# Altium PCB PCB1.PcbDoc
Units mil, origin at the board's own origin, x right, y up, seen from the top; angles counter-clockwise.
Board outline 1161.95 x 1752.5 mil, 2 copper layers (Top Layer, Bottom Layer); 51 components, 40 nets, 198 pads, 66 vias.
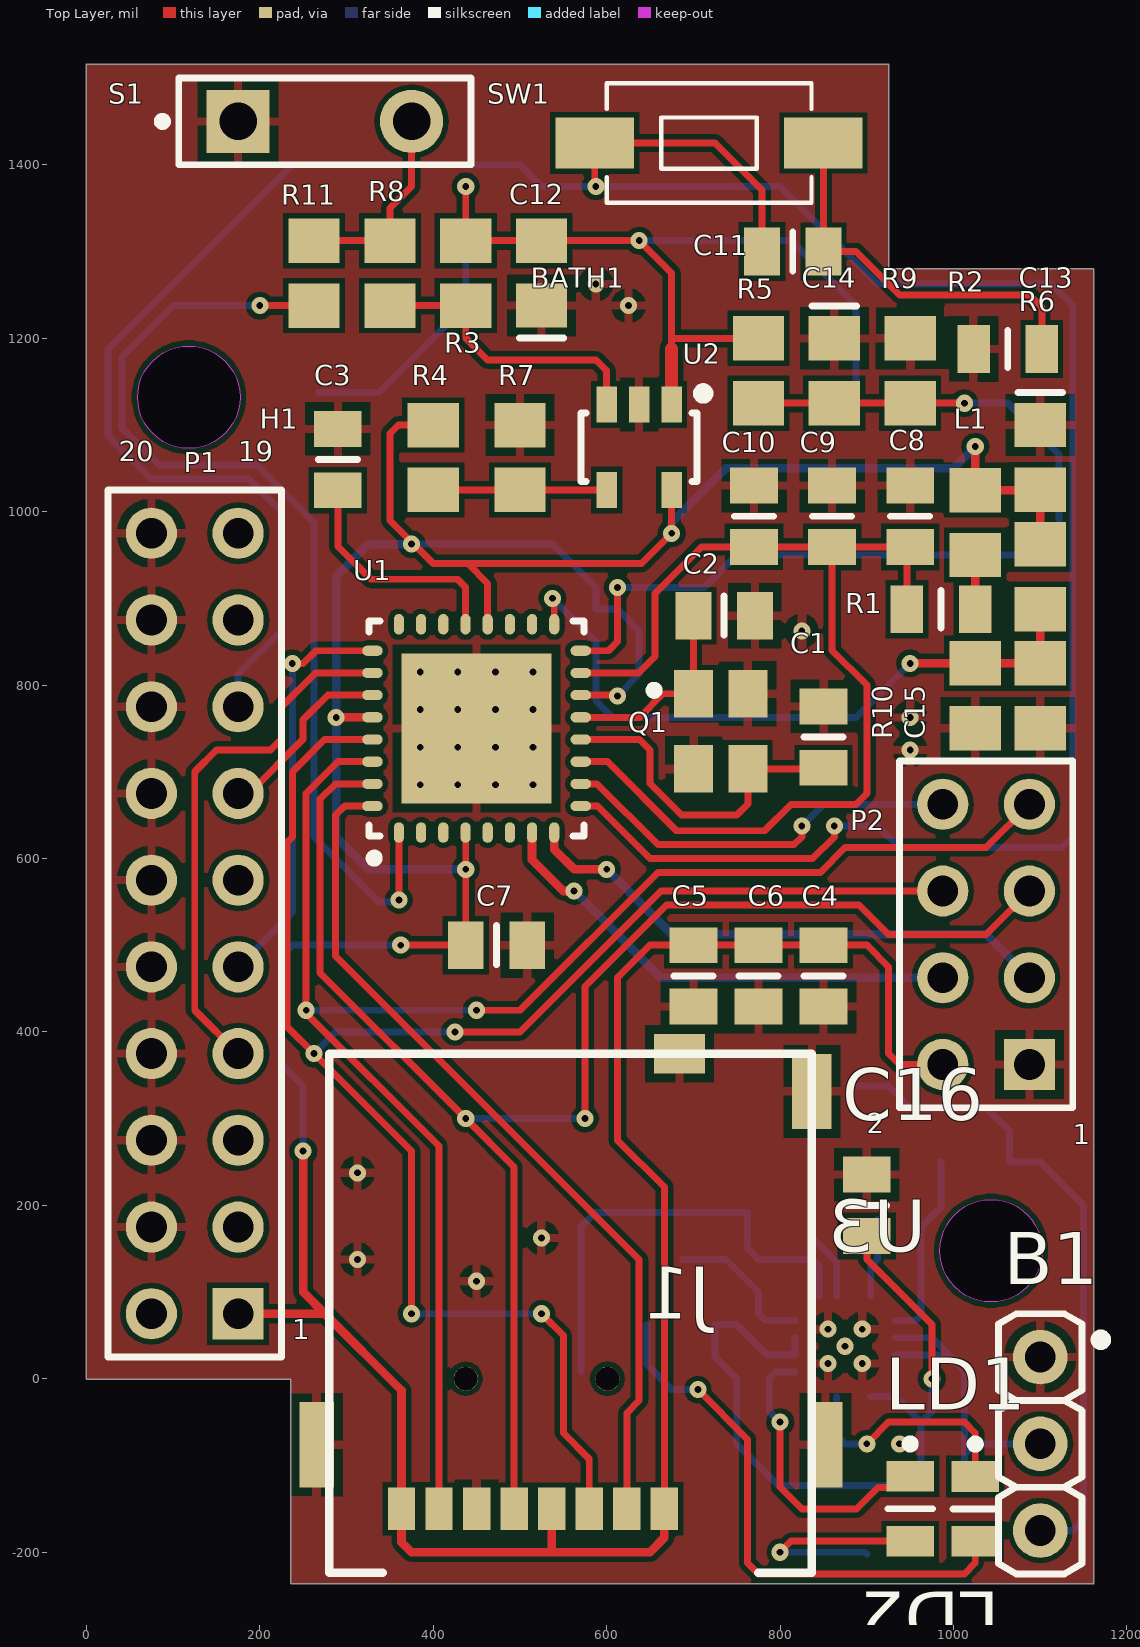
[diagram p0: Top Layer view]
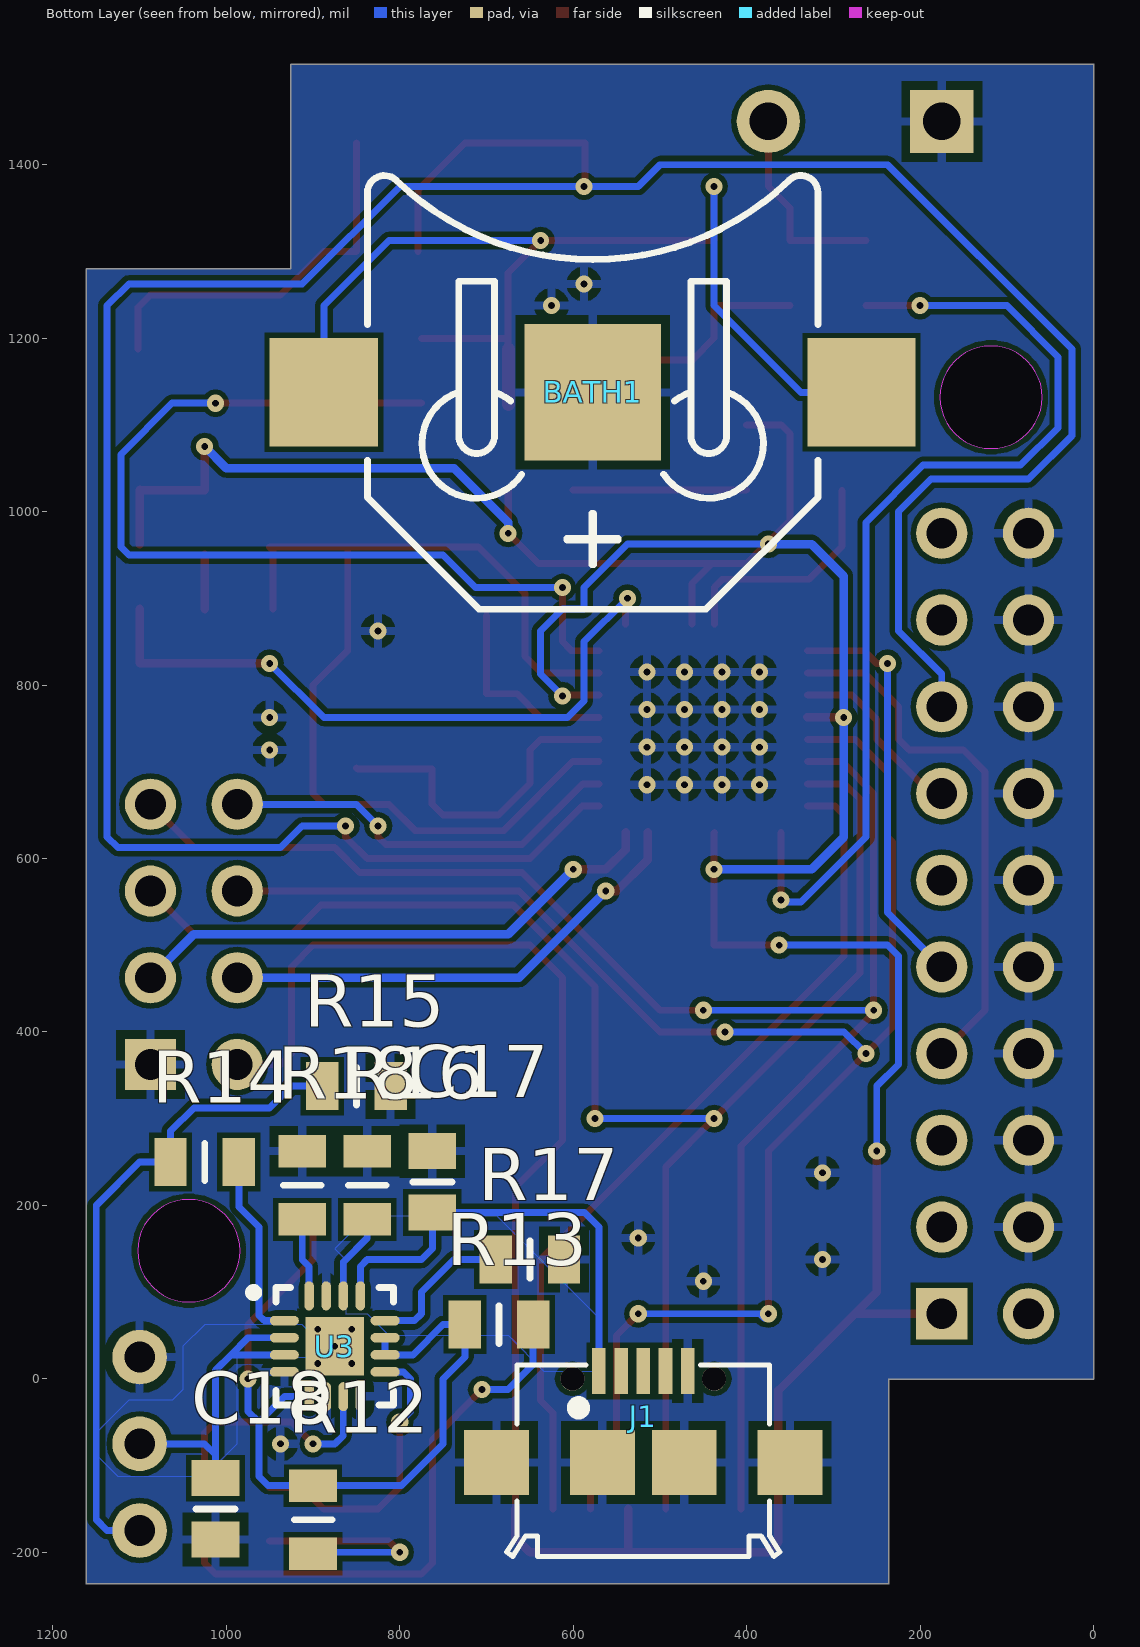
[diagram p1: Bottom Layer view, seen from below]
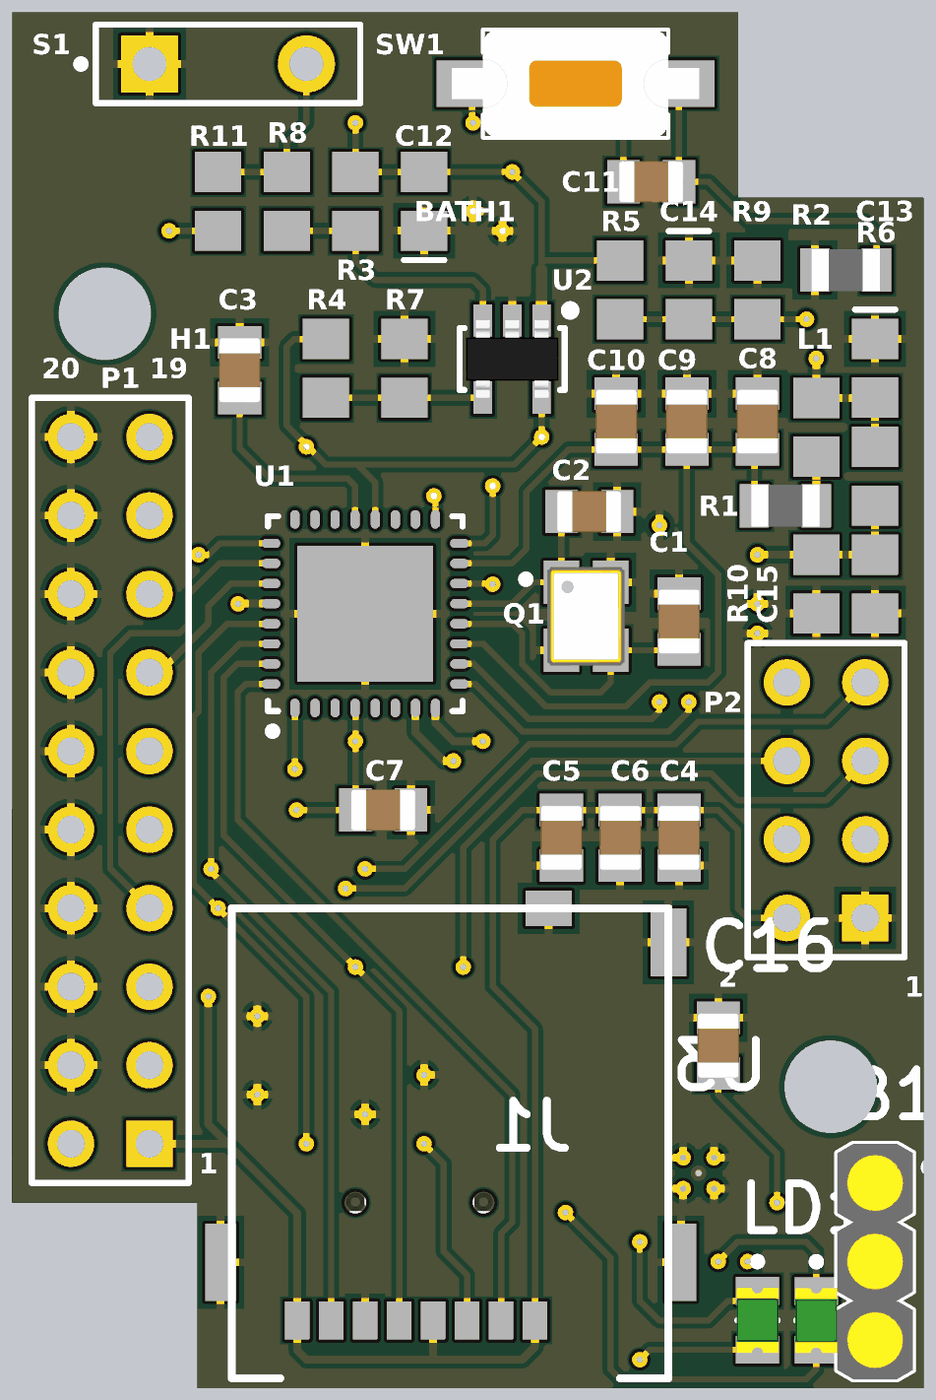
[diagram p2: 3D render of the assembled board from above, using the file's embedded part models]
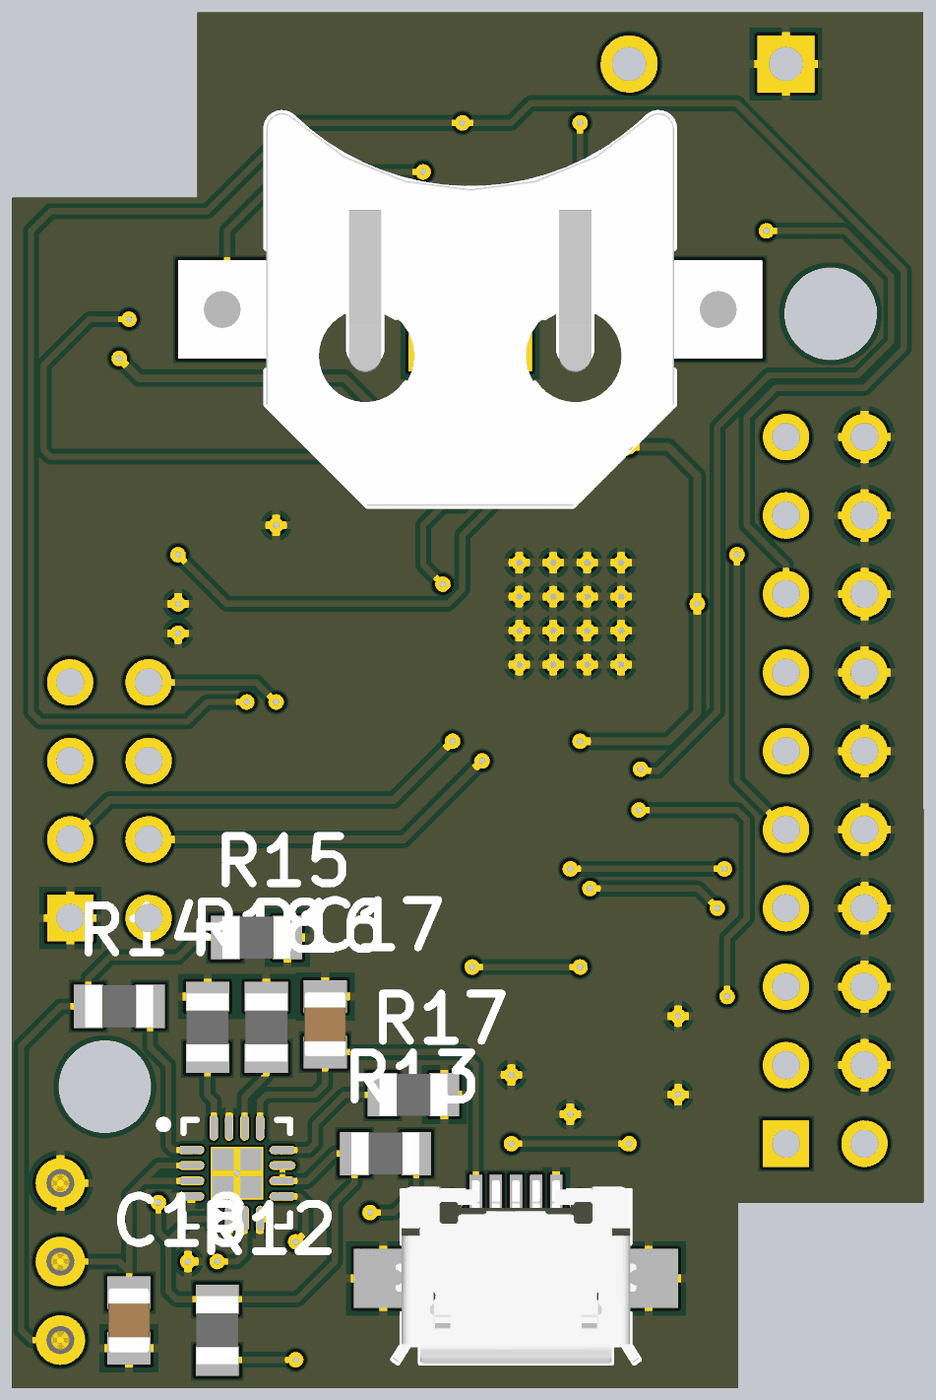
[diagram p3: 3D render of the assembled board from below, using the file's embedded part models]

## Layer stack, top to bottom
Top Solder: solder mask 0.4, Solder Resist, Dk 3.5
Top Layer: signal copper 1.4
Dielectric 1: dielectric 12.6, FR-4, Dk 4.8
Bottom Layer: signal copper 1.4
Bottom Solder: solder mask 0.4, Solder Resist, Dk 3.5

## Board outline
0,-0.27 cw(c0,0) -0.26,0 -0.26,1515.75 cw(c0,1515.75) 0,1516.01 925.2,1516.01 cw(c925.2,1515.75) 925.46,1515.75 925.46,1279.79 1161.42,1279.79 cw(c1161.42,1279.53) 1161.68,1279.53 1161.68,-236.22 cw(c1161.42,-236.22) 1161.42,-236.49 236.22,-236.49 cw(c236.22,-236.22) 235.96,-236.22 235.96,-0.27
cut-out: 1043.31,88.58 cw(c1043.31,147.64) 984.25,147.64 cw(c1043.31,147.64) 1043.31,206.69 cw(c1043.31,147.64) 1102.36,147.64 cw(c1043.31,147.64)
cut-out: 118.11,1072.83 cw(c118.11,1131.89) 59.06,1131.89 cw(c118.11,1131.89) 118.11,1190.94 cw(c118.11,1131.89) 177.17,1131.89 cw(c118.11,1131.89)

## Design rules (kind name [scope] priority, off if disabled: settings)
Clearance Clearance_1 [InNamedPolygon('NETB1_2_L02_P006')] p1: gap=8 ignorepadtopadclearanceinfootprint=FALSE
Clearance [All] p2: gap=6 ignorepadtopadclearanceinfootprint=FALSE
MinimumSolderMaskSliver [All] p1: minsoldermaskwidth=0
PlaneClearance [All] p1: clearance=8
PolygonConnect [All] p1: connectstyle=Relief reliefconductorwidth=10 reliefentries=4 polygonreliefangle="90 Angle" airgapwidth=10
RoutingVias [All] p1: holewidth=28 width=50 viastyle="Through Hole" minholewidth=28 minwidth=50 maxholewidth=28 maxwidth=50 useviatemplates=TRUE viatemplateguid#1={8B917390-28B2-4EA5-9BB1-488258DD5807} viatemplatename#1=v50h20
SilkToSilkClearance [All] p1: silktosilkclearance=0
SilkToSolderMaskClearance [IsPad] p1: minsilkscreentomaskgap=0 clearancetoexposedcopper=TRUE
SolderMaskExpansion [All] p1: expansion=4
Width [All] p1: maxlimit=15 minlimit=6 preferedwidth=8
26 further rules are at their usual default settings.

## Classes and differential pairs
component class U_mcu: C1 C2 C3 C4 C5 C6 C7 C11 C12 C17 C18 L1 P1 Q1 R15 R17 SW1 U1
component class U_power: BATH1 C12 C13 C14 C15 R3 R4 R5 R6 R7 R8 R9 R10 R11 S1 U2
component class U_sensor: B1 C6 C9 C16 C17 C18 H1 J1 LD1 LD2 P2 R1 R2 R12 R13 R14 R15 R16 R17 R18 U3

## Components (designator, comment, footprint, x,y, rotation, side; value= is the part's Value field where it differs from the comment)
B1 "Test Point" COMATEL_331.0600.1.03.500 1100,25 r270 top
BATH1 "Value" BATH_KEYSTONE_3000 577.56,1137.5 r180 bottom
C1 "22pF" CAPC2012X135N 850,740 r270 top
C2 "22pF" CAPC2012X135N 735.43,880 r180 top
C3 "1uF" CAPC2012X135N 290,1060 r270 top
C4 "10uF" CAPC2012X135N 850,464.57 r90 top
C5 "100nF" CAPC2012X135N 700,464.57 r90 top
C6 "100nF" CAPC2012X135N 775,464.57 r90 top
C7 "100nF" CAPC2012X135N 472.93,500 r180 top
C8 "10uF" CAPC2012X135N 950,994.57 r270 top
C9 "10nF" CAPC2012X135N 860,994.57 r270 top
C10 "10nF" CAPC2012X135N 770,994.57 r270 top
C11 "22pF" CAPC2012X135N 814.57,1300 r180 top
C12 "C0805" 0805 525,1275.1 r90 top value=1uF
C13 "C0805" 0805 1100,1062.5 r270 top value=1uF
C14 "C0805" 0805 862.5,1162.4 r270 top value=1uF
C15 "C0805" 0805 1100,787.6 r90 top value=1uF
C16 "4.7uF" CAPC2012X135N 900,200 r270 top
C17 "1uF" CAPC2012X135N 762.5,227.07 r270 bottom
C18 "4.7uF" CAPC2012X135N 1012.5,-150 r90 bottom
H1 "SDKART" PCBComponent_1 836.61,324.8 r180 top
J1 "629105136821" 629105136821 519.19,-88.58 r180 bottom
L1 "BLM21BD102SN1D" 6-0805 1025,987.4 r270 top
LD1 "Green" LED_OSRAM_LGR971 950,-149.9 r270 top
LD2 "Green" LED_OSRAM_LGR971 1025,-150.1 r270 top
P1 "Header 10X2" HDR2X10 175,75 r90 top
P2 "Header 4X2" HDR2X4 1087.5,362.5 r90 top
Q1 "25MHz" XTAL_EPSON_TSX-3225 731.5,746.69 r0 top
R1 "1R" RESC2012X60N 985.63,887.5 r0 top
R2 "1K" RESC2012X60N 1062.5,1187.5 r0 top
R3 "ERA6Y" ERA-0805 437.5,1275 r90 top value=100K
R4 "ERA6Y" ERA-0805 400,1062.4 r90 top value=150K
R5 "ERA6Y" ERA-0805 775,1162.4 r90 top value=100K
R6 "ERA6Y" ERA-0805 1100,925 r90 top value=100K
R7 "ERA6Y" ERA-0805 500,1062.4 r270 top value=100K
R8 "ERA6Y" ERA-0805 350,1275 r270 top value=0R
R9 "ERA6Y" ERA-0805 950,1162.4 r270 top value=100K
R10 "ERA6Y" ERA-0805 1025,787.6 r90 top value=100K
R11 "ERA6Y" ERA-0805 262.5,1275 r270 top value=0R
R12 "1K" RESC2012X60N 900,-162.5 r90 bottom
R13 "1K" RESC2012X60N 685.63,62.5 r0 bottom
R14 "47K" RESC2012X60N 1025,250 r180 bottom
R15 "47K" RESC2012X60N 850,337.5 r180 bottom
R16 "47K" RESC2012X60N 837.5,223.13 r270 bottom
R17 "1K" RESC2012X60N 650,137.5 r0 bottom
R18 "680R" RESC2012X60N 912.5,223.13 r270 bottom
S1 "REED" SPST-2 275,1450 r0 top
SW1 "434111043826" 434111043826 718.11,1425 r180 top
U1 "EFM32TG210F32-QFN32" ENMR-QFN32_N 450,750 r90 top
U2 "000000" SOT-25 637.4,1074.21 r270 top value=AP2127
U3 "BQ24075RGTR" RGT16-1700X1700TP 875,37.5 r180 bottom

## Footprints (in the part's own frame and the unit in brackets; to place one, negate y for a bottom-side part, rotate by r counter-clockwise, add the part's x,y. Pads: shape width x height; smd on the part's side, far side on the other; paste and mask are expansions set on the pad)
6-0805 [mm] "Chip Resistor; Body 2 x 1.2 mm (LxW typ)"
  rect 1.3x1.5 smd: 1(-0.95,0) 2(0.95,0)
0805 [mm] "Chip Capacitor; Body 2.0 x 1.2 mm (LxW typ)"
  rect 1.3x1.5 smd: 1(-0.95,0) 2(0.95,0)
  silkscreen extent -1.9,-0.65 -1.9,0.65
434111043826 [mm] "6.0*3.5mm vertical type, SMD, height 4.3mm, white actuator, 260gf, T&R"
  rect 2.3x1.5 smd: 1(-3.35,0) 2(3.35,0)
  silkscreen extent -3,-1.75 3,1.75, body extent -4,-1.75 4,1.75, height 4.3
629105136821 [mm] "Micro USB 2.0 SMT Type B Horizontal 5 Contacts"
  rect 0.4x1.35 smd: 1(-1.3,2.475) 2(-0.65,2.475) 3(0,2.475) 4(0.65,2.475) 5(1.3,2.475)
  rect 1.9x1.9 smd: Shell(-4.3,-0.2) Shell(-1.2,-0.2) Shell(1.2,-0.2) Shell(4.3,-0.2)
  round 0.7 hole 0.7 unplated: ""(-2.075,2.25) ""(2.075,2.25)
  silkscreen extent -4,-2.95 4,2.65, body extent -4,-2.95 4,2.97, height 2.75
BATH_KEYSTONE_3000 [mm] "SMD Battery Holder for BR1216, CR1216, BR1220, CL1220, CR1220, BR1225 Coin Cells"
  rect 3.175x3.175 smd: 1(-7.873,0) 1(7.873,0)
  rect 4x4 smd paste-2: 2(0,0)
  silkscreen extent -6.6,-6.35 6.6,6.35, body extent -9.46,-6.35 9.46,6.35, height 3.17
CAPC2012X135N [mm] "Chip Capacitor, Body 2.0x1.25mm, IPC Medium Density"
  rect 1.05x1.4 smd: 1(-0.9,0) 2(0.9,0)
  silkscreen extent 0,-0.58 0,0.58, body extent -1.05,-0.67 1.05,0.68, height 1.25
COMATEL_331.0600.1.03.500 [mm] "3 \"U\" Pins Strip Terminals Components Support, Pitch 2.54mm"
  round 1.6 hole 0.9: 1(0,0) 2(2.54,0) 3(5.08,0)
  silkscreen extent -1.27,-1.23 6.35,1.93, body extent -1.27,-1.22 6.35,1.23, height 5.7
ENMR-QFN32_N [mm] "QFN, 32-Leads, Body 6x6mm, Pitch 0.65mm, Thermal Pad 4.4x4.4mm, IPC Medium Density"
  rect 4.4x4.4 smd: 0(0,0)
  oval 0.6x0.3 smd: 1(-3.05,2.275) 2(-3.05,1.625) 3(-3.05,0.975) 4(-3.05,0.325) 5(-3.05,-0.325) 6(-3.05,-0.975) 7(-3.05,-1.625) 8(-3.05,-2.275) 17(3.05,-2.275) 18(3.05,-1.625) 19(3.05,-0.975) 20(3.05,-0.325) 21(3.05,0.325) 22(3.05,0.975) 23(3.05,1.625) 24(3.05,2.275)
  oval 0.3x0.6 smd: 9(-2.275,-3.05) 10(-1.625,-3.05) 11(-0.975,-3.05) 12(-0.325,-3.05) 13(0.325,-3.05) 14(0.975,-3.05) 15(1.625,-3.05) 16(2.275,-3.05) 25(2.275,3.05) 26(1.625,3.05) 27(0.975,3.05) 28(0.325,3.05) 29(-0.325,3.05) 30(-0.975,3.05) 31(-1.625,3.05) 32(-2.275,3.05)
  silkscreen extent -3.92,-3.15 3.15,3.15, body extent -3,-3 3,3, height 0.9
ERA-0805 [mm] "Chip Resistor; Body 2 x 1.3 mm (LxW typ)"
  rect 1.3x1.5 smd: 1(-0.95,0) 2(0.95,0)
HDR2X4 [mm] "Connector; Header; 4x2 Position"
  rect 1.5x1.5 hole 0.9: 1(0,0)
  round 1.5 hole 0.9: 2(0,2.54) 3(2.54,0) 4(2.54,2.54) 5(5.08,0) 6(5.08,2.54) 7(7.62,0) 8(7.62,2.54)
  silkscreen extent -1.27,-1.27 8.89,3.81
HDR2X10 [mm] "Connector; Header; 10x2 Position"
  rect 1.5x1.5 hole 0.9: 1(0,0)
  round 1.5 hole 0.9: 2(0,2.54) 3(2.54,0) 4(2.54,2.54) 5(5.08,0) 6(5.08,2.54) 7(7.62,0) 8(7.62,2.54) 9(10.16,0) 10(10.16,2.54) 11(12.7,0) 12(12.7,2.54) 13(15.24,0) 14(15.24,2.54) 15(17.78,0) 16(17.78,2.54) 17(20.32,0) 18(20.32,2.54) 19(22.86,0) 20(22.86,2.54)
  silkscreen extent -1.27,-1.27 24.13,3.81
LED_OSRAM_LGR971 [mm] "Green Chip LED, 2-Leads, Body 2.0x1.25mm, IPC Medium Density"
  rect 0.9x1.4 smd: 1(-0.95,0) 2(0.95,0)
  silkscreen extent -2.02,-0.65 0,0.65, body extent -1.05,-0.67 1.05,0.68, height 0.9
PCBComponent_1 [mm]
  rect 0.8x1.24 smd: 1(4.32,12.06) 2(5.42,12.06) 3(6.52,12.06) 4(7.62,12.06) 5(8.72,12.06) 6(9.82,12.06) 7(10.92,12.06) 8(12.02,12.06)
  rect 1x2.5 smd: 6(-0.4,10.18) 6(14.5,10.18)
  rect 1.15x2.2 smd: 6(0,-0.17)
  rect 1.5x1.15 smd: 6(3.88,-1.27)
  silkscreen extent 0,-1.27 14.14,13.93
RESC2012X60N [mm] "Chip Resistor, EIA 0805, Metric 2012, Body 2.0x1.2mm, IPC Medium Density"
  rect 0.95x1.4 smd: 1(-1,0) 2(1,0)
  silkscreen extent 0,-0.55 0,0.55, body extent -1.1,-0.67 1.1,0.68, height 0.6
RGT16-1700X1700TP [mm] "QFN, 16-Leads, Body 3x3mm, Pitch 0.5mm, Thermal Pad 1.7x1.7mm, TI Recommended"
  oval 0.85x0.28 smd paste-0.025 mask+0.07: 1(-1.475,0.75) 2(-1.475,0.25) 3(-1.475,-0.25) 4(-1.475,-0.75) 9(1.475,-0.75) 10(1.475,-0.25) 11(1.475,0.25) 12(1.475,0.75)
  oval 0.28x0.85 smd paste-0.025 mask+0.07: 5(-0.75,-1.475) 6(-0.25,-1.475) 7(0.25,-1.475) 8(0.75,-1.475) 13(0.75,1.475) 14(0.25,1.475) 15(-0.25,1.475) 16(-0.75,1.475)
  rect 1.7x1.7 smd paste-0.85 mask+0.07: 17(0,0)
  silkscreen extent -2.5,-1.73 1.73,1.73, body extent -1.57,-1.57 1.58,1.58, height 1
SOT-25 [mm] "5-Lead Plastic Small Outline Transistor - Medium Density"
  rect 1.05x0.6 smd: 1(-1.25,0.95) 2(-1.25,0) 3(-1.25,-0.95) 4(1.25,-0.95) 5(1.25,0.95)
  silkscreen extent -1.72,-1.7 1,2.02, body extent -1.25,-1.5 1.25,1.5, height 1.09
SPST-2 [mm] "Switch; 2 Leads"
  rect 1.85x1.85 hole 1.1: 1(-2.54,0)
  round 1.85 hole 1.1: 2(2.54,0)
  silkscreen extent -4.89,-1.27 4.28,1.27
XTAL_EPSON_TSX-3225 [mm] "Oscillator TSX-3225 Serie, Corner Concave; 4 pin, 2.50mm L X 3.2mm W X 0.6mm H"
  rect 1.15x1.4 smd: 1(-0.8,1.1) 2(-0.8,-1.1) 3(0.8,-1.1) 4(0.8,1.1)
  silkscreen extent -2.07,1.08 -1.83,1.32, body extent -1.25,-1.6 1.25,1.6, height 0.6

## Part data
B1: library part COMATEL_331.0600.1.03.500, "3 Positions Terminal Strip", Manufacturer="KONTEK COMATEL", Manufacturer Part Number=331.0600.1.03.500, Author="CERN DEM JLC", ComponentHeight=5.7mm, Component Type=Standard, CreateDate=16.12.2010, Family="Test Point", HelpURL=\\cern.ch\dfs\Applications\Altium\Datasheets\COMATEL_331.0600.1.03.500.pdf, LatestRevisionDate=27.08.2013, Mounted=Yes, Part Description="3 \"U\" Pins Strip Terminals Components Support, Pitch 2.54mm", Part Number=COMATEL_331.0600.1.03.500, Pin Count=3, SMD=No, Socket=No, Status=Obsolete, Table="STELVIO-KONTEK COMATEL"
BATH1: library part BATH_KEYSTONE_3000, "Battery Holder whit 2 Pin", Manufacturer=KEYSTONE, Manufacturer Part Number=3000, Author="CERN DEM JLC", ComponentHeight=3.17mm, Component Type=Standard, CreateDate=17.04.2012, Family=Battery, HelpURL=\\cern.ch\dfs\Applications\Altium\Datasheets\BATH_KEYSTONE_3000.pdf, LatestRevisionDate=17.04.2012, Mounted=Yes, PackageDescription="SMD Battery Holders for BR1216, CR1216, BR1220, CL1220, CR1220, BR1225 Coin Cells", Part Description="SMD Battery Holders for BR1216, CR1216, BR1220, CL1220, CR1220, BR1225 Coin Cells", Part Number=BATH_KEYSTONE_3000, Pin Count=3, SMD=No, Socket=No, Table=Batteries
C1 C2 C4 C5 C6 C7 C8 C9 C10 C11 C16 C17 C18: library part CC0805_10NF_50V_10%_X7R, "Non-polarised capacitor", Case=0805, Manufacturer=GENERIC, Manufacturer1 ComponentHeight=1.35mm, Manufacturer1 Example=EPCOS, Manufacturer1 Part Number=B37941K5103K60, Tolerance=±10%, Voltage=50V, Author="CERN DEM JLC", Component Type=Standard, CreateDate=03.12.2007, HelpURL=\\cern.ch\dfs\Applications\Altium\Datasheets\CC0805_X7R_EPCOS.pdf, LatestRevisionDate=03.12.2007, Manufacturer Part Number=CC0805_10NF_50V_10%_X7R, Mounted=Yes, Part Description="SMD Multilayer Chip Ceramic Capacitor", Part Number=CC0805_10NF_50V_10%_X7R, Pin Count=2, SMD=Yes, Socket=No, Status=Preferred, Table="Capacitors SMD", TC=X7R
C3: library part CC0805_1NF_50V_5%_X7R, "Non-polarised capacitor", Case=0805, Manufacturer=GENERIC, Manufacturer1 ComponentHeight=0.94mm, Manufacturer1 Example=AVX, Manufacturer1 Part Number=08055C102JAT2A, Tolerance=±5%, Voltage=50V, Author="CERN DEM JLC", Component Type=Standard, CreateDate=18.01.2011, HelpURL=\\cern.ch\dfs\Applications\Altium\Datasheets\CC0805_X7R_AVX.pdf, LatestRevisionDate=18.01.2011, Manufacturer Part Number=CC0805_1NF_50V_5%_X7R, Mounted=Yes, Part Description="SMD Multilayer Chip Ceramic Capacitor", Part Number=CC0805_1NF_50V_5%_X7R, Pin Count=2, SMD=Yes, Socket=No, Status=None, Table="Capacitors SMD", TC=X7R
C12 C13 C14 C15: "Ceramic Chip Capacitor - Standard", PackageDocument=Mar-2001, Code_IPC=2012[0805], Code_JEITA=0805, ComponentLink1Description="Manufacturer Link", ComponentLink1URL=http://www.kemet.com/, ComponentLink2Description=Datasheet, ComponentLink2URL=http://www.kemet.com/kemet/web/homepage/kechome.nsf/vapubfilesname/F3102TA.pdf/$file/F3102TA.pdf, DatasheetDocument=Mar-2001, LatestRevisionDate=19-Mar-2004, LatestRevisionNote="Silkscreen size reduced.", Note="Footprint corresponds to dimensions for bulk cassette packaging. This case size has tightened tolerances.", PackageReference=0805, Published=17-Jul-2002, Publisher="Altium Limited"
J1: "Micro USB 2.0 SMT Type B Horizontal 5 Contacts WR-COM", ComponentLink1Description=Manufacturer, ComponentLink1URL=http://www.we-online.de, ComponentLink2Description=Datasheet, ComponentLink2URL=http://katalog.we-online.de/em/datasheet/629105136821.pdf, Construction=SMT, Gender=Receptacle, Interface Type="Type B", Part Number=629105136821, Published Date="April 2017", Publisher="Wurth Elektronik", Sub-Family="Micro USB 2.0", Type=Horizontal
L1: library part 7427920, "SMD EMI Suppression Ferrite Bead WE-CBF, Z = 11 Ohm", ComponentLink1Description="Manufacturer URL", ComponentLink1URL=http://www.we-online.com, ComponentLink2Description=Datasheet, ComponentLink2URL=http://www.we-online.de/katalog/media/pdf/7427920.pdf, DatasheetVersion=Dec-2005, Impedance="11 Ohm", PackageDescription="Chip Inductor, 2-Leads, Body 2.0 x 1.2 mm", PackageReference=SMD-0805, PartNumber=7427920
LD1 LD2: library part LED_OSRAM_LGR971, "LED Green 1C 2A", Case=0805, Manufacturer=OSRAM, Manufacturer Part Number=LGR971, Author="CERN DEM JLC", Color=Green, ComponentHeight=0.9mm, Component Type=Standard, CreateDate=28.01.2009, HelpURL=\\cern.ch\dfs\Applications\Altium\Datasheets\LED_OSRAM_LGR971.pdf, LatestRevisionDate=17.03.2010, Mounted=Yes, PackageDescription="Green Chip LED, 2-Leads, Body 2.0x1.25mm, IPC Medium Density", Part Description="Surface Mount Green LED (0805 Case)", Part Number=LED_OSRAM_LGR971, Pin Count=2, SMD=Yes, Socket=No, Table="LEDs & Displays"
P1: "Header, 10-Pin, Dual row", LatestRevisionDate=17-Jul-2002, LatestRevisionNote="Re-released for DXP Platform.", Publisher="Altium Limited"
P2: "Header, 4-Pin, Dual row", LatestRevisionDate=17-Jul-2002, LatestRevisionNote="Re-released for DXP Platform.", Publisher="Altium Limited"
Q1: library part XTAL_25MHZ_EPSON_TSX-322525.0000MF10Z-AC, "Crystal 4 pins 1=XTAL Control 2=GND3=XTAL 4=GND", Manufacturer=EPSON, Manufacturer Part Number=TSX-322525.0000MF10Z-AC, Author="CERN DEM JLC", ComponentHeight=0.6mm, ComponentLink1Description="Ordering Informations", ComponentLink1URL=\\cern.ch\dfs\Applications\Altium\Datasheets\XTAL_EPSON_TSX-3225_Ordering-Informations.pdf, Component Type=Standard, CreateDate=03.04.2012, HelpURL=\\cern.ch\dfs\Applications\Altium\Datasheets\XTAL_EPSON_TSX-3225.pdf, LatestRevisionDate=03.04.2012, Mounted=Yes, PackageDescription="Oscillator TSX-3225 Serie, Corner Concave; 4 pin, 2.50mm L X 3.2mm W X 0.6mm H", Part Description="Tolerance ±10 ppm,  Stability:± 10ppm, -20°C to 75°C, 9pF, Surface Mount Quartz Crystal, TX-3225 Serie", Part Number=XTAL_25MHZ_EPSON_TSX-322525.0000MF10Z-AC, Pin Count=4, SMD=Yes, Socket=No, Table="Crystals & Oscillators"
R1 R2 R12 R13 R14 R15 R16 R17 R18: library part R0805_1K1_0.1%_0.1W_10PPM, "Resistor - 0.1%", Case=0805, Manufacturer=GENERIC, Manufacturer1 ComponentHeight=0.6mm, Manufacturer1 Example="TYCO HOLSWORTHY", Manufacturer1 Part Number=RN73C2A1K1BTG, Power=0.1W, Tolerance=±0.1%, Author="CERN DEM JLC", Component Type=Standard, CreateDate=03.12.2007, HelpURL=\\cern.ch\dfs\Applications\Altium\Datasheets\R0805_Tyco_RN73.pdf, LatestRevisionDate=13.03.2008, Manufacturer Part Number=R0805_1K1_0.1%_0.1W_10PPM, Mounted=Yes, Part Description="Thin Film Chip Resistor", Part Number=R0805_1K1_0.1%_0.1W_10PPM, Pin Count=2, SMD=Yes, Socket=No, Status="Not recommended", Table="Resistors SMD", TC=±10ppm
R3 R4 R5 R6 R7 R8 R9 R10 R11: "Rectangular Thick Film Chip Resistor, 10 Ohm to 1M Ohm Range, 0.1% and 0.5% Tolerance, 0805 Size, 0.1 W", PackageDocument=Mar-2003, Code_IPC="2012 [0805]", ComponentLink1Description="Manufacturer Link", ComponentLink1URL=http://www.panasonic.com/industrial/components/resistive_products.htm, ComponentLink2Description=Datasheet, ComponentLink2URL=http://www.panasonic.com/industrial/components/pdf/AOA0000CE8.pdf, LatestRevisionDate=19-Mar-2004, LatestRevisionNote="Silkscreen size reduced.", Note="If flow soldering, adjust pad width of PCB Footprint to 0.7 - 0.8 times the width of the resistor.", PackageReference=ERA-0805, Published=17-Dec-2003, Publisher="Altium Limited"
S1: library part SW-SPST, "Single-Pole, Single-Throw Switch", LatestRevisionDate=17-Jul-2002, LatestRevisionNote="Re-released for DXP Platform.", PackageDescription="Switch; 2 Leads", PackageReference=SPST-2, Published=24-Mar-1999, Publisher="Altium Limited"
SW1: "WS-TASV SMD Tact Switch 6.0X3.5 mm", ComponentLink1Description="Manufacturer URL", ComponentLink1URL=http://www.we-online.com, ComponentLink2Description=Datasheet, ComponentLink2URL=http://katalog.we-online.de/em/datasheet/434111043826.pdf, NoPins=02, PackageReference=434111043826, PartNumber=434111043826
U1: "EFM32 Tiny Gecko, M3 ARM Cortex CPU, 32 KB Flash, 4 KB RAM, 1.85 - 3.8 V Supply, 32 MHz Max Speed, -40 to 85 degC, 32-Pin QFN, RoHS Compliant", Generic Part Number=EFM32TG210, Supplier Part Number 1=914-1034-2-ND, Supply Voltage (V)="1.85 - 3.8", ADC=Y, AES=Y, ARM Cortex CPU=M3, ComponentLink1Description="Manufacturer URL", ComponentLink1URL=http://www.energymicro.com/, ComponentLink2Description=Datasheet, ComponentLink2URL=http://cdn.energymicro.com/dl/devices/pdf/d0012_efm32tg210_datasheet.pdf, ComponentLink3Description="Package Specification", ComponentLink3URL=http://cdn.energymicro.com/dl/devices/pdf/d0004_efm32g210_datasheet.pdf, DatasheetVersion="Rev 1.00", Flash (KB)=32, GPIO=24, LESENSE=Y, Max Speed (MHz)=32, Mounting Technology="Surface Mount", OPAMPS=3, PackageDescription="32-Pin Quad Flat No Lead Package, Body 6 x 6 mm, Pitch 0.65 mm", PackageReference=QFN32, PackageVersion="Rev. 98SPP32088A_XO1_10MAR2011", PartNumber=EFM32TG210F32-QFN32, RAM (KB)=4, Subcategory="EFM32 Tiny Gecko", Supplier 1=Digi-Key, Supplier 2=Digi-Key, Supplier 3=Digi-Key, Supplier 4=Mouser, Supplier Part Number 2=914-1034-1-ND, Supplier Part Number 3=914-1034-6-ND, Supplier Part Number 4=904-EFM32TG210F32
U2: library part AP7331-WG, "LDO 300mA,  Low Quiescent Current, Fast Transient", Package=SOT23-5, PN=000000
U3: "USB-Friendly Li-Ion Battery Charger and Power-Path Management IC, Vout 5.5 V, 4.3 V, -40 to 85 degC, 16-pin QFN (RGT), Green (RoHS & no Sb/Br)", Manufacturer="Texas Instruments", Over Voltage Protection=N, Supplier Part Number 1=BQ24075RGTR-ND, Code_JEDEC=MO-220, ComponentLink1Description=Datasheet, ComponentLink1URL=http://www.ti.com/general/docs/lit/getliterature.tsp?genericPartNumber=BQ24075&fileType=pdf, DatasheetVersion=SLUS810G, Eco-Plan="Green (RoHS & no Sb/Br)", Lead Acid=N, Li-Ion=N, Li-Polymer=N, Mounting Technology="Surface Mount", NiCd=N, NiMH=N, PackageDescription="16-Pin Plastic Quad Flat No-Lead, 3 x 3 mm Body, 0.5 mm Pitch, 1.7 x 1.7 mm Exposed Pad", PackageReference=RGT16-1700X1700TP, PackageVersion="revH, Oct-2011", PartNumber=BQ24075RGTR, SubFamily="Battery Charge Management", Supplier 1=Digi-Key, Supplier 2=Newark, Supplier 3=Mouser, Supplier Part Number 2=31P7535, Supplier Part Number 3=595-BQ24075RGTR, Vin(Min)(V)=4.3

## Via types
v1: diameter 19.68, hole 7.87, Top Layer to Bottom Layer, 61 vias
v2: diameter 19.68, hole 7.87, Top Layer to Bottom Layer, tented bottom, 4 vias
v3: diameter 19.68, hole 7.87, Top Layer to Bottom Layer, tented both sides, 1 vias

## Nets (pads, with @x,y where several pads share a name; then routed paths per layer and width w, separated by ;. In a path a pad name is that pad's centre, name@x,y a point inside that pad or via, vN(x,y) a via of type N, cw(c..) or ccw(c..) an arc to the next point about the centre after c; other vN are vias at no path point)
2V5: C4.2 C5.2 C6.2 C7.2 C13.2 H1.1 H1.4 H1.8 L1.1 P1.1 P2.2 R4.2 R6.2 U1.4 U1.14 U1.20 U1.28 U2.5 | length 5058
  Top Layer w8: v1(362.5,500) C7.2 v1(437.5,587.5) 437.5,629.63 U1.4 ; R4.2 359.8,1099.8 350,1090 350,990 400,940 440,940 ; U1.20 462.8,917.2 440,940 ; U1.14 611.61,788.39 v1(612.5,787.5) ; H1.1 666.54,220.96 612.5,275 612.5,462.5 650,500 C5.2 C6.2 C4.2 900,500 925,475 925,375 937.5,362.5 P2.2 ; v1@674.8,974.8 640,940 440,940 ; v1@674.8,975 U2.5 675,1024.8 v1(675,975)
  Top Layer w10: P1.1 275,75 ; v1(250,262.5) 250,100 275,75 ; v1(288.09,762.5) 287.8,762.8 U1.28 ; H1.4 536.61,-199.11 537.5,-200 ; H1.1 666.54,-183.46 650,-200 537.5,-200 ; v1(1025,1075) L1.1 1099.7,1024.8 C13.2 R6.2 ; 275,75 363.39,-13.39 H1.8 363.39,-188.39 375,-200 537.5,-200
  Bottom Layer w8: v1(250,262.5) 250,337.5 225,362.5 225,487.5 237.5,500 v1(362.5,500) ; v1(375,962.5) 537.5,962.5 587.5,912.5 587.5,887.5 612.5,887.5 637.5,862.5 637.5,812.5 v1(612.5,787.5)
  Bottom Layer w10: v1(375,962.5) 325,962.5 288.09,925.59 v1(288.09,762.5) 288.09,624.41 325,587.5 v1(437.5,587.5) ; v1(675,975) 675,987.5 737.5,1050 1000,1050 v1(1025,1075)
5v: C17.2 J1.1 U3.13 | length 532.2
  Bottom Layer w8: J1.1 570.37,175 587.01,191.63 C17.2 762.5,150 775,137.5 837.5,137.5 845.47,129.53 U3.13
bat: C14.2 R5.1 R9.2 U1.16 | length 1115.4
  Top Layer w8: U1.16 602.07,839.57 612.5,850 v1(612.5,912.5) ; R5.1 C14.2 R9.2 v1(1012.5,1125)
  Bottom Layer w8: v1(612.5,912.5) 712.5,912.5 750,950 1112.5,950 1121.5,959 1121.5,1066 1062.5,1125 v1(1012.5,1125)
CLK: H1.5 P2.5 U1.31 | length 1855
  Top Layer w8: U1.31 287.15,686.02 269.5,668.37 269.5,468 v1(437.5,300) 493.31,244.19 H1.5 ; v1(575,300) 575,452.37 669.13,546.5 891,546.5 925,512.5 1037.5,512.5 P2.5
  Bottom Layer w8: v1(437.5,300) v1(575,300)
GND: B1.1 BATH1.2 C1.1 C2.1 C3.1 C4.1 C5.1 C6.1 C7.1 C8.1 C9.1 C10.1 C12.1 C13.1 C14.1 C15.1 C16.1 C17.1 C18.1 H1.6 J1.5 J1.Shell P1.4 P1.6 P1.8 P1.10 P1.12 P1.14 P1.16 P1.18 P1.20 P2.1 Q1.2 Q1.4 R2.1 R7.1 R9.1 R10.1 R15.2 R16.1 R17.1 R18.1 S1.1 U1.0 U2.2 U3.4 U3.6 U3.8 U3.15 U3.17
  other v1: 937.5,-75 450,112.5 312.5,137.5 525,162.5 312.5,237.5 385.04,685.04 428.35,685.04 471.65,685.04 514.96,685.04 950,725 385.04,728.35 428.35,728.35 471.65,728.35 514.96,728.35 950,762.5 385.04,771.65 428.35,771.65 471.65,771.65 514.96,771.65 385.04,814.96 428.35,814.96 471.65,814.96 514.96,814.96 825,862.5 625,1237.5 587.5,1262.5
  other v2: 855.31,17.81 894.68,17.81 855.32,57.19 894.69,57.19
  other v3: 875,37.5
HFXTAL_N: C2.2 Q1.1 U1.13 | length 231.2
  Top Layer w8: U1.13 637.8,762.8 665,790 Q1.1 C2.2
HFXTAL_P: C1.2 Q1.3 U1.12 | length 385
  Top Layer w8: U1.12 637.8,737.2 650,725 650,686.22 686.22,650 750,650 762.99,662.99 Q1.3 848.82,703.39 C1.2
IRQ: P2.8 U1.10 | length 473
  Top Layer w8: U1.10 588.98,686.02 659,616 816,616 825,625 v1(825,637.5)
  Bottom Layer w8: v1(825,637.5) 850,662.5 P2.8
MISO: H1.7 P2.7 U1.30 | length 1921.4
  Top Layer w8: v1@253.5,421.5 406.69,268.31 H1.7 ; v1(253.5,425) 253.5,675 290.11,711.61 U1.30 ; v1(450,425) 500,425 659,584 846.5,584 875,612.5 1037.5,612.5 P2.7
  Bottom Layer w8: v1(253.5,425) v1(450,425) ; P2.7@1087.5,650 P2.7
MOSI: H1.3 P2.6 U1.29 | length 1999.1
  Top Layer w8: U1.29 274.7,737.2 237.5,700 237.5,625 231.66,619.16 231.66,405.84 v1(262.5,375) 375,262.5 v1(375,75) ; v1(425,400) 500,400 662.5,562.5 P2.6 ; v1(525,75) 550,50 550,-62.5 579.92,-92.42 H1.3
  Bottom Layer w8: v1(262.5,375) 287.5,400 v1(425,400) ; v1(375,75) 379.92,70.08 384.84,75 v1(525,75)
NetB1_2: B1.2 C18.2 U3.2 U3.3 | length 373.7
  Bottom Layer w8: U3.3 994.69,27.66 ; U3.2 975,47.34 994.69,27.66 ; C18.2 1012.5,-87.5 ; B1.2 1025,-75 1012.5,-87.5 ; 994.69,27.66 1012.5,9.84 1012.5,-87.5
NetB1_3: B1.3 R14.1 R15.1 | length 768.6
  Bottom Layer w8: R15.1 925,337.5 950,312.5 1037.5,312.5 1064.37,285.63 R14.1 1100,250 1150,200 1150,-162.5 1137.5,-175 B1.3 B1.3@1100,-162.5
NetBATH1_1: BATH1.1 C12.2 R3.2 R5.2 U2.1 | length 1297.2
  Top Layer w8: v1(437.5,1375) R3.2 524.9,1312.4 C12.2 v1(637.5,1312.5) 675,1275 675,1199.8 ; 674.8,1187.5 675,1187.7 675,1199.8 ; R5.2 675,1199.8
  Top Layer w15: U2.1 674.8,1187.5
  Bottom Layer w8: BATH1.1@267.62,1137.5 337.5,1137.5 437.5,1237.5 v1(437.5,1375) ; v1(637.5,1312.5) 812.5,1312.5 887.5,1237.5 BATH1.1@887.5,1137.5
NetC3_2: C3.2 U1.21 | length 274
  Top Layer w8: C3.2 290,960 328,922 428,922 437.2,912.8 U1.21
NetC8_2: C8.2 C9.2 C10.2 R1.1 U1.11 U1.15 | length 1237.2
  Top Layer w8: U1.11 600.89,711.61 680.5,632 782,632 812.5,662.5 887.5,662.5 900,675 900,800 860,840 C9.2 ; U1.15 636.6,813.98 655.57,832.94 655.57,905.57 709.13,959.13 C10.2 C9.2 ; R1.1 946.26,955.39 C8.2 C9.2
NetC11_1: C11.1 R2.2 SW1.1 | length 451.7
  Top Layer w8: SW1.1 C11.1 887.5,1300 937.5,1250 1087.5,1250 1101.87,1235.63 R2.2
NetC16_2: C16.2 R12.2 R13.2 U3.5 U3.10 U3.11 | length 894.2
  Top Layer w8: C16.2 900,137.5 975,62.5 v1(975,0)
  Bottom Layer w8: U3.11 U3.10 784.84,27.66 750,62.5 R13.2 725,25 750,0 750,-75 798.13,-123.13 R12.2 951.87,-123.13 962.5,-112.5 962.5,-50 ; U3.5 933.07,-20.57 962.5,-50 ; v1(975,0) 975,-37.5 962.5,-50
NetL1_2: L1.2 R1.2 | length 62.5
  Top Layer w10: R1.2 L1.2
NetLD1_1: LD1.1 U3.9 | length 333.5
  Top Layer w8: v1(800,-50) 800,-125 825,-150 887.89,-150 912.7,-125.2 LD1.1@950,-125.2
  Bottom Layer w8: v1(800,-50) 787.5,-37.5 787.5,0 795.47,7.97 U3.9
NetLD1_2: LD1.2 R12.1 | length 256
  Top Layer w8: v1(800,-200) 812.7,-187.3 LD1.2
  Bottom Layer w8: v1(800,-200) 898.13,-200 R12.1
NetLD2_1: LD2.1 U3.7 | length 274.2
  Top Layer w8: v1(900,-75) 925,-50 1012.5,-50 1025,-62.5 LD2.1
  Bottom Layer w8: U3.7 865.16,-65.16 875,-75 v1(900,-75)
NetLD2_2: LD2.2 R13.1 | length 638.7
  Top Layer w8: v1(705.2,-12.5) 762.5,-69.8 762.5,-212.5 775,-225 1012.5,-225 1025,-212.5 LD2.2
  Bottom Layer w8: R13.1 646.26,16.24 675,-12.5 v1(705.2,-12.5)
NetR3_1: R3.1 R8.2 U2.3 | length 342.2
  Top Layer w8: R8.2@350,1237.7 R3.1@437.5,1237.7 ; R3.1 437.5,1200 462.5,1175 587.5,1175 600,1162.5 U2.3
NetR4_1: R4.1 R7.2 U2.4 | length 200
  Top Layer w8: R4.1 R7.2 U2.4
NetR8_1: R8.1 R11.1 S1.2 | length 235.5
  Top Layer w8: R11.1 R8.1 350,1350 375,1375 S1.2
NetR14_2: R14.2 U3.1 | length 218.3
  Bottom Layer w8: U3.1 956.3,67.03 962.5,73.23 962.5,175 985.63,198.13 R14.2
NetR16_2: R16.2 U3.14 | length 99.6
  Bottom Layer w8: R16.2 837.5,162.5 865.16,134.84 U3.14
NetR17_2: R17.2 U3.12 | length 173.3
  Bottom Layer w8: R17.2@687.5,137.5 737.5,137.5 775,100 775,75 782.97,67.03 U3.12
NetR18_2: R18.2 U3.16 | length 91.5
  Bottom Layer w8: U3.16 904.53,129.53 912.5,137.5 R18.2
NetU1_5: U1.5
NetU1_6: U1.6
REED: R11.2 U1.1 | length 1164.8
  Top Layer w8: v1(200,1237.5) 262.4,1237.5 R11.2 ; v1(360.43,552.07) U1.1
  Bottom Layer w8: v1(200,1237.5) 100,1237.5 41,1178.5 41,1096.5 84,1053.5 196.5,1053.5 262.5,987.5 262.5,625 337.5,550 358.37,550 v1(360.43,552.07)
Reset: C11.2 P1.15 SW1.2 U1.9 | length 3429.9
  Top Layer w8: U1.9 589.57,660.43 650,600 837.5,600 862.5,625 v1(862.5,637.5) ; v1(587.5,1375) 586.22,1376.28 SW1.2 725,1425 779.13,1370.87 C11.2
  Bottom Layer w8: P1.15 175,812.5 225,862.5 225,1000 187.5,1037.5 75,1037.5 25,1087.5 25,1187.5 237.5,1400 500,1400 525,1375 v1(587.5,1375) 800,1375 912.5,1262.5 1112.5,1262.5 1137.5,1237.5 1137.5,625 1125,612.5 937.5,612.5 912.5,637.5 v1(862.5,637.5)
RF_CE: P2.3 U1.8 | length 628.7
  Top Layer w10: U1.8 539.57,610.43 562.5,587.5 v1(600,587.5)
  Bottom Layer w10: v1(600,587.5) 675,512.5 1037.5,512.5 P2.3
RF_CS: P2.4 U1.7 | length 561.3
  Top Layer w10: U1.7 513.98,598.52 550,562.5 v1(562.5,562.5)
  Bottom Layer w10: v1(562.5,562.5) 662.5,462.5 P2.4
SD_CS: H1.2 U1.32 | length 997.6
  Top Layer w8: U1.32 297.93,660.43 287.5,650 287.5,487.5 637.5,137.5 637.5,-25 623.23,-39.27 H1.2
SWCLK: P1.9 U1.25 | length 474.3
  Top Layer w8: v1(237.5,825) 250,825 264.57,839.57 U1.25
  Bottom Layer w8: P1.9 237.5,537.5 v1(237.5,825)
SWDIO: P1.7 U1.26 | length 619.8
  Top Layer w8: P1.7 125,425 125,700 150,725 212.5,725 225,737.5 225,775 263.98,813.98 U1.26
SWO: P1.13 U1.27 | length 215.1
  Top Layer w8: P1.13 187.5,675 250,737.5 250,760 278.39,788.39 U1.27
VDD_A: C15.2 R6.1 R10.2 U1.17 | length 778.8
  Top Layer w8: v1(537.5,900) 539.57,897.93 U1.17
  Top Layer w10: v1(950,825) R10.2 C15.2 R6.1
  Bottom Layer w8: v1(537.5,900) 587.5,850 587.5,781.61 606.61,762.5 887.5,762.5 v1(950,825)
pads on no net: J1. J1.2 J1.3 J1.4 P1.2 P1.3 P1.5 P1.11 P1.17 P1.19 U1.2 U1.3 U1.18 U1.19 U1.22 U1.23 U1.24

## Polygon pours and split planes (outlines as drawn)
5v on Bottom Layer "Bottom Layer-No Net 1" (solid, remove dead copper, pour order 4): 570.37,8.86 570.37,70.37 687.5,187.5 837.5,187.5 875,150 862.5,137.5 862.5,75 837.5,75 812.5,50 675,50 633.86,8.86
GND on Bottom Layer "Bottom Layer-No Net" (solid, pour order 0): 0,0 0,1515.75 925.2,1515.75 925.2,1279.53 1161.42,1279.53 1161.42,-236.22 236.22,-236.22 236.22,0
NetB1_2 on Bottom Layer "NETB1_2_L02_P006" (solid, pour order 6): 905.36,55.36 912.5,62.5 1025,62.5 1050,37.5 1050,-12.5 1062.5,-25 1112.5,-25 1150,-62.5 1150,-87.5 1125,-112.5 1025,-112.5 987.5,-75 987.5,25 899.93,25
GND on Top Layer "Top Layer-GND" (solid, pour order 2): 0,0 0,1515.75 925.2,1515.75 925.2,1279.53 1161.42,1279.53 1161.42,-236.22 236.22,-236.22 236.22,0

## Silkscreen, mask and mechanical layers (free items; w line width, h text height)
Mechanical 1:
  circle w0.5: c1043.31,147.64 r59.06
  circle w0.5: c118.11,1131.89 r59.06
  lines w0.5: 0,0 0,1515.75 925.2,1515.75 925.2,1279.53 1161.42,1279.53 1161.42,-236.22 236.22,-236.22 236.22,0 0,0
Mechanical 3:

## Text inside footprints (layer, text, board x,y; h text height)
J1: Mechanical 15 "PCB Edge" at 590.06,-185.04 h39.37
P1: Top Overlay "1" at 237.5,37.5 h40; Top Overlay "19" at 175,1050 h40; Top Overlay "20" at 37.5,1050 h40
P2: Top Overlay "1" at 1137.5,262.5 h40; Top Overlay "2" at 900,275 h40